# Altium PCB 剥皮器20200614.PCBDOC (part 2 of 3)
Units mm, origin at the board's own origin, x right, y up, seen from the top; angles counter-clockwise.
Board outline 140 x 88 mm, 4 copper layers (Top Layer, MidLayer1, MidLayer2, Bottom Layer); 134 components, 105 nets, 507 pads, 469 vias.
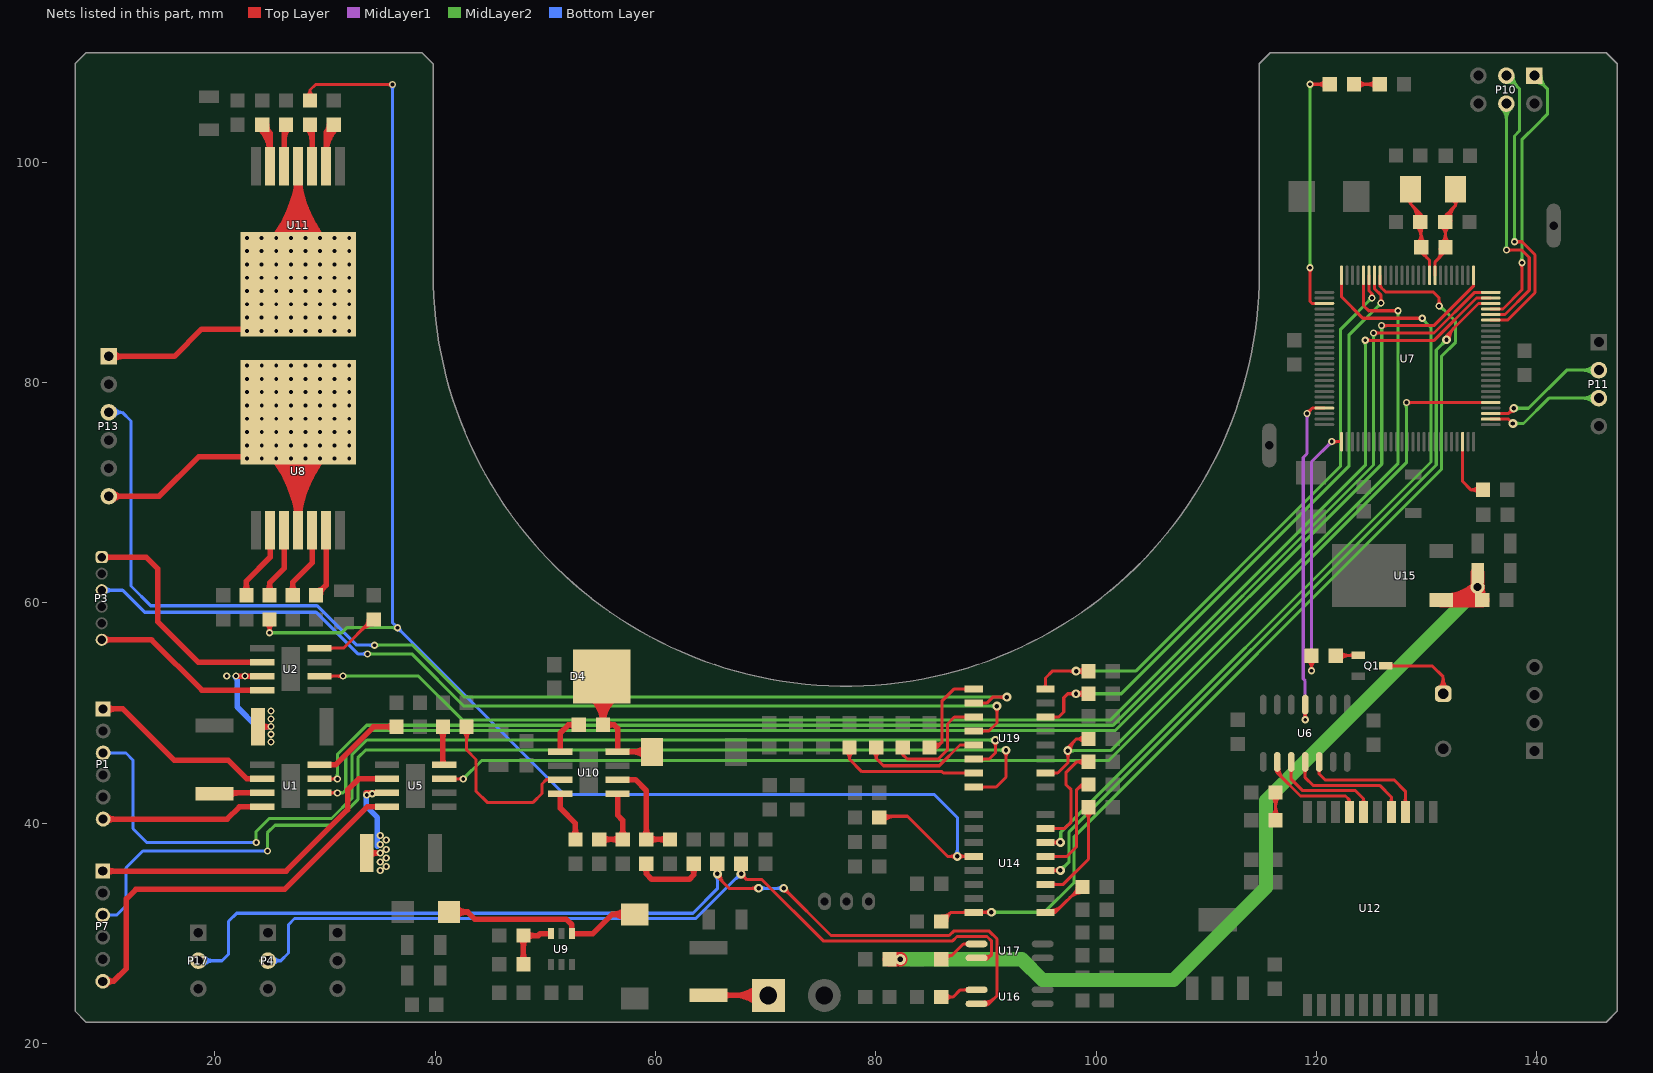
[diagram p4: the nets of this part, all layers, seen from the top]

## Via types
v1: diameter 0.65, hole 0.35, Top Layer to Bottom Layer, 296 vias
v2: diameter 0.8, hole 0.4, Top Layer to Bottom Layer, 161 vias
v3: diameter 1.27, hole 0.711, Top Layer to Bottom Layer, 6 vias
v4: diameter 1, hole 0.5, Top Layer to Bottom Layer, 6 vias

## Nets (pads, with @x,y where several pads share a name; then routed paths per layer and width w, separated by ;. In a path a pad name is that pad's centre, name@x,y a point inside that pad or via, vN(x,y) a via of type N, cw(c..) or ccw(c..) an arc to the next point about the centre after c; other vN are vias at no path point) (continued)
INH: R29.2 R31.1 R43.2 U14.12 | length 157.1
  Top Layer w0.28: R31.1@24.612,58.126 cw(c23.779,57.278) v1(24.968,57.278) ; v1@24.837,57.409 ccw(c24.522,57.724) 24.968,57.724 ccw(c25.415,57.724) v1@25.099,57.409 ; R31.1@24.968,58.488 v1(24.968,57.278) ; R31.1@25.324,58.126 ccw(c26.157,57.278) v1(24.968,57.278) ; R29.2@28.354,106.029 ccw(c28.011,106.549) 28.634,106.549 ; R29.2@28.634,105.605 28.634,106.549 ; R29.2@28.913,106.029 cw(c29.256,106.549) 28.634,106.549 ; v1@35.995,106.91 ccw(c35.679,106.594) 35.679,107.041 ccw(c35.679,107.488) v1@35.995,107.172 ; v1(36.126,107.041) 29.126,107.041 28.634,106.549 ; R43.2@80.313,40.625 82.869,40.625 86.512,36.982 U14.12@88.893,36.982 ; R43.2@80.475,40.351 cw(c81.137,39.688) 81.137,40.625 ; R43.2@80.672,40.153 cw(c81.813,39.012) 81.813,40.625 ; R43.2@80.672,40.871 ccw(c81.266,41.464) 81.266,40.625 ; 86.751,36.982 cw(c86.751,36.333) v2@87.21,36.792 ; 86.781,36.982 ccw(c86.781,37.589) v2@87.21,37.16 ; v2@87.578,36.792 cw(c88.037,36.333) 88.037,36.982 ; v2@87.578,37.16 ccw(c88.007,37.589) 88.007,36.982 ; U14.12@88.262,36.851 ccw(c87.947,36.536) 87.947,36.982 ccw(c87.947,37.429) U14.12@88.262,37.113
  MidLayer2 w0.28: v1(24.968,57.278) 31.513,57.278 31.975,57.74 v1(36.574,57.74) ; v1@25.099,57.147 cw(c25.415,56.831) 25.415,57.278 cw(c25.415,57.724) v1@25.099,57.409 ; v1@36.443,57.609 ccw(c36.127,57.293) 36.127,57.74 ccw(c36.127,58.187) v1@36.443,57.871
  Bottom Layer w0.28: v1@35.995,106.91 cw(c35.679,106.594) 36.126,106.594 cw(c36.573,106.594) v1@36.257,106.91 ; v1(36.126,107.041) 36.126,58.188 51.711,42.603 85.301,42.603 87.394,40.51 v2(87.394,36.976) ; v1@36.389,57.74 ccw(c35.942,57.74) 36.258,58.056 ccw(c36.574,58.372) v1@36.574,57.925 ; v1@36.574,57.555 cw(c36.574,57.108) 36.89,57.424 cw(c37.206,57.74) v1@36.759,57.74 ; v2@87.21,37.16 ccw(c86.766,37.604) 87.394,37.604 ccw(c88.022,37.604) v2@87.578,37.16
NetC6_1: C6.1 R45.1 U7.33 Y1.1 | length 19.1
  Top Layer w0.28: U7.33@130.767,89.726 130.767,90.95 131.703,91.887 131.703,95.164 132.628,96.089 ; 130.966,91.15 ccw(c130.26,91.856) R45.1@131.217,92.141 ; 131.298,91.482 ccw(c130.772,92.008) R45.1@131.485,92.221 ; C6.1@131.329,94.213 cw(c130.424,93.309) 131.703,93.309 ; R45.1@131.344,92.645 ccw(c130.478,93.512) 131.703,93.512 ccw(c132.929,93.512) R45.1@132.062,92.645 ; C6.1@131.636,94.562 cw(c132.491,94.722) 131.876,95.337 ; 131.703,93.384 cw(c132.876,93.384) C6.1@132.047,94.213 ; C6.1@131.912,94.614 cw(c133.125,94.84) 132.252,95.713 ; C6.1@132.187,94.665 cw(c133.758,94.958) 132.628,96.089 ; Y1.1@132.327,96.535 cw(c132.146,96.089) 132.628,96.089 ; Y1.1@132.628,97.645 132.628,96.089 ; Y1.1@132.93,96.533 ccw(c133.106,96.089) 132.628,96.089
NetC8_1: C8.1 R45.2 U7.34 Y1.2 | length 19.8
  Top Layer w0.28: Y1.2@128.308,96.507 cw(c128.224,96.216) 128.528,96.216 ; Y1.2@128.528,97.645 128.528,96.216 ; 128.585,96.158 cw(c127.139,94.712) C8.1@129.18,94.586 ; Y1.2@128.748,96.506 ccw(c128.829,96.216) 128.528,96.216 ; 129.024,95.719 cw(c127.966,94.661) C8.1@129.46,94.569 ; C8.1@129.049,94.213 cw(c127.951,93.115) 129.503,93.115 ; R45.2@129.144,92.645 ccw(c128.278,93.512) 129.503,93.512 ccw(c130.729,93.512) R45.2@129.862,92.645 ; C8.1@129.211,95.04 ccw(c129.087,95.336) 129.408,95.336 ; C8.1@129.247,94.411 cw(c128.627,93.791) 129.503,93.791 ; C8.1@129.408,94.572 129.408,95.336 ; 129.463,95.28 cw(c128.793,94.61) C8.1@129.739,94.551 ; 129.503,93.578 cw(c130.402,93.578) C8.1@129.767,94.213 ; C8.1@129.503,94.476 129.503,91.836 130.267,91.073 U7.34@130.267,89.726 ; C8.1@129.604,95.04 cw(c129.729,95.336) 129.408,95.336 ; R45.2@129.701,92.173 ccw(c130.144,91.918) 129.783,91.557 ; R45.2@129.944,92.033 ccw(c130.473,91.73) 130.042,91.298 ; 128.528,96.216 129.408,95.336
NetC9_1: C9.1 U7.98 | length 7.4
  Top Layer w0.28: U7.98@133.267,74.626 133.267,71.007 134.018,70.256 ; C9.1@134.734,69.926 ccw(c134.018,69.313) 134.018,70.256 ; C9.1@134.734,70.586 cw(c134.018,71.2) 134.018,70.256 ; C9.1@135.12,70.256 134.018,70.256
NetC17_1: C17.1 U10.1 | length 5.1
  Top Layer w0.5: U10.1@51.35,46.482 51.35,48.175 52.095,48.92 ; C17.1@52.74,48.645 ccw(c52.095,48.027) 52.095,48.92 ; C17.1@52.74,49.196 cw(c52.095,49.813) 52.095,48.92 ; C17.1@53.027,48.92 52.095,48.92
NetC17_2: C17.2 D4.3 L2.1 U10.8 | length 28.1
  Top Layer w0.5: D4.3@53.932,51.6 cw(c51.807,48.92) C17.2@55.227,48.92 ; D4.3@54.243,51.992 cw(c52.628,49.955) 55.227,49.955 ; C17.2@54.946,49.202 ccw(c54.267,49.881) 55.227,49.881 ccw(c56.188,49.881) 55.509,49.202 ccw(c56.188,49.881) 56.188,48.92 ccw(c56.188,47.96) C17.2@55.509,48.639 ; 55.227,49.895 cw(c57.75,49.895) D4.3@56.278,51.944 ; 55.227,50.871 cw(c57.049,50.871) D4.3@55.986,52.35 ; D4.3@55.227,52.215 C17.2@55.227,48.92 ; D4.3@56.569,51.538 ccw(c58.451,48.92) C17.2@55.227,48.92 ; 57.818,46.482 cw(c57.818,44.585) L2.1@59.16,45.926 ; 57.941,46.482 ccw(c57.941,48.206) L2.1@59.16,46.987 ; L2.1@59.309,46.482 U10.8@56.55,46.482 56.55,48.606 56.236,48.92 C17.2@55.227,48.92
NetC19_1: C19.1 C22.1 U10.6 | length 13.8
  Top Layer w0.5: U10.6@56.55,43.942 58.166,43.942 59.17,42.938 C19.1@59.17,38.521 C22.1@61,38.521 ; C19.1@58.889,38.802 ccw(c58.21,39.481) 59.17,39.481 ccw(c60.13,39.481) 59.451,38.802 ccw(c60.13,39.481) 60.13,38.521 ccw(c60.13,37.561) C19.1@59.451,38.24 ; C22.1@61.035,38.24 ccw(c60.356,37.561) 60.356,38.521 ccw(c60.356,39.481) C22.1@61.035,38.802
NetC19_2: C19.2 R20.2 | length 9.6
  Top Layer w0.5: C19.2@58.895,36.034 cw(c58.278,35.389) 59.17,35.389 ; C19.2@59.17,36.321 59.17,35.389 ; C19.2@59.445,36.034 ccw(c60.062,35.389) 59.17,35.389 ; R20.2@63.181,36.04 cw(c62.502,35.361) 63.462,35.361 cw(c64.422,35.361) R20.2@63.743,36.04 ; R20.2@63.462,36.321 63.462,35.292 63.076,34.906 59.653,34.906 59.17,35.389
NetC23_1: C23.1 U10.4 | length 6.2
  Top Layer w0.5: U10.4@51.35,42.672 51.35,41.36 52.731,39.979 C23.1@52.731,38.521 ; C23.1@52.45,38.802 ccw(c51.771,39.481) 52.731,39.481 ccw(c53.692,39.481) C23.1@53.013,38.802
NetC36_1: C36.1 C37.2 L4.2 U15.1 | length 84.1
  Top Layer w1.295: L4.2@81.233,27.641 v4(82.232,27.641) ; U15.1@131.324,60.236 C37.2@135.031,60.236 ; U15.1@131.781,60.236 ccw(c131.781,64.268) v3@134.632,61.417 ; C37.2@134.623,60.265 C36.1@134.623,62.708 ; v3@134.623,61.264 ccw(c136.059,61.264) C37.2@135.044,60.249
  MidLayer2 w1.295: v4(82.232,27.641) 93.235,27.641 95.127,25.749 107.01,25.749 115.415,34.154 115.415,42.055 134.623,61.263 v3(134.623,61.426)
NetD2_1: D2.1 R8.1 | length 5.9
  Top Layer w0.28: D2.1@123.411,107.072 R8.1@125.501,107.072 ; D2.1@123.77,106.713 cw(c124.637,105.847) 124.637,107.072 cw(c124.637,108.298) D2.1@123.77,107.431 ; R8.1@125.383,106.713 ccw(c124.517,105.847) 124.517,107.072 ccw(c124.517,108.298) R8.1@125.383,107.431
NetD3_1: D3.1 L1.2 U9.1 | length 24.2
  Top Layer w0.5: D3.1@41.254,31.934 42.938,31.934 ; D3.1@41.811,31.432 cw(c42.938,30.417) 42.938,31.934 ; D3.1@41.811,32.435 ccw(c42.938,33.45) 42.938,31.934 ; L1.2@57.33,31.181 ccw(c56.055,29.91) 56.055,31.71 ; L1.2@57.33,32.24 cw(c56.055,33.511) 56.055,31.71 ; L1.2@58.111,31.71 56.054,31.71 ; 42.938,31.934 43.609,31.263 51.918,31.263 52.406,30.775 U9.1@52.406,29.972 54.316,29.972 56.054,31.71
NetD6_2: D6.2 R23.1 | length 6.3
  Top Layer w0.28: D6.2@115.93,40.618 ccw(c115.063,41.485) 116.289,41.485 ccw(c117.515,41.485) D6.2@116.648,40.618 ; R23.1@115.93,42.415 cw(c115.063,41.548) 116.289,41.548 cw(c117.515,41.548) R23.1@116.648,42.415 ; D6.2@116.289,40.322 R23.1@116.289,42.774
NetF1_1: F1.1 P12.1 | length 14.3
  Top Layer w0.5: F1.1@64.816,24.379 P12.1@70.22,24.379 ; F1.1@66.174,24.131 cw(c66.771,23.534) 66.771,24.379 cw(c66.771,25.224) F1.1@66.174,24.626 ; 67.172,24.379 cw(c67.172,21.29) P12.1@69.357,23.474 ; 67.273,24.379 ccw(c67.273,27.326) P12.1@69.357,25.242 ; 68.38,24.379 cw(c68.38,22.497) P12.1@69.71,23.828 ; 68.48,24.379 ccw(c68.48,26.118) P12.1@69.71,24.888
NetLS1_1: LS1.1 Q1.3 | length 11.5
  Top Layer w0.28: Q1.3@126.294,54.28 130.492,54.28 131.496,53.276 LS1.1@131.496,51.741 ; Q1.3@126.718,54.131 cw(c127.076,53.773) 127.076,54.28 cw(c127.076,54.787) Q1.3@126.718,54.428 ; LS1.1@131.065,52.172 ccw(c130.023,53.213) 131.496,53.213 ccw(c132.969,53.213) LS1.1@131.927,52.172 ; LS1.1@131.263,51.974 ccw(c130.699,52.537) 131.496,52.537 ccw(c132.293,52.537) LS1.1@131.729,51.974
NetP1_1: P1.1 U1.6 | length 18.7
  Top Layer w0.5: P1.1@9.86,50.363 11.65,50.363 16.293,45.72 21.209,45.72 22.911,44.018 U1.6@24.299,44.018 ; P1.1@10.161,50.063 cw(c10.886,49.337) 10.886,50.363 cw(c10.886,51.389) P1.1@10.161,50.664
NetP1_6: P1.6 U1.8 | length 16.5
  Top Layer w0.5: P1.6@9.86,40.363 21.111,40.363 22.226,41.478 U1.8@24.299,41.478 ; P1.6@10.161,40.063 cw(c10.886,39.337) 10.886,40.363 cw(c10.886,41.389) P1.6@10.161,40.664
NetP3_1: P3.1 U2.6 | length 22.5
  Top Layer w0.5: P3.1@9.728,64.143 13.76,64.143 14.818,63.085 14.818,58.262 18.47,54.61 U2.6@24.299,54.61 ; P3.1@9.94,63.931 cw(c10.452,63.419) 10.452,64.143 cw(c10.452,64.867) P3.1@9.94,64.355
NetP3_6: P3.6 U2.8 | length 17.6
  Top Layer w0.5: P3.6@9.728,56.643 14.246,56.643 18.819,52.07 U2.8@24.299,52.07 ; P3.6@9.94,56.431 cw(c10.452,55.919) 10.452,56.643 cw(c10.452,57.367) P3.6@9.94,56.855
NetP4_2: P4.2 R36.2 U17.2 | length 84.5
  Top Layer w0.28: R36.2@67.484,35.891 cw(c67.173,35.4) v2@67.754,35.4 ; v2@67.582,35.573 ccw(c67.166,35.989) R36.2@67.754,35.989 ; R36.2@67.754,36.044 ccw(c68.421,36.044) v2@67.95,35.573 ; R36.2@67.754,36.321 v2@67.754,35.4 ; v2@67.766,35.129 cw(c67.766,34.502) 68.209,34.945 ; v2(67.766,35.389) 68.287,34.868 69.67,34.868 75.226,29.312 86.969,29.312 87.366,29.709 90.089,29.709 90.509,29.289 90.509,28.064 ; R36.2@68.025,35.891 ccw(c68.336,35.4) v2@67.754,35.4 ; v2@68.026,35.389 ccw(c68.654,35.389) 68.21,34.944 ; U17.2@89.143,27.762 90.207,27.762 ; U17.2@89.807,27.648 ccw(c89.921,28.003) 90.184,27.739 ; U17.2@89.892,27.915 ccw(c90.078,28.495) 90.509,28.064 ; U17.2@89.961,27.654 cw(c90.207,27.428) 90.207,27.762 ; U17.2@89.961,27.87 ccw(c90.207,28.096) 90.207,27.762 ; 90.207,27.762 90.509,28.064
  Bottom Layer w0.28: P4.2@24.816,27.508 25.987,27.508 ; P4.2@25.315,27.158 cw(c25.987,26.688) 25.987,27.508 ; P4.2@25.315,27.858 ccw(c25.987,28.328) 25.987,27.508 ; 67.219,34.902 cw(c67.766,34.356) v2@67.766,35.129 ; 67.365,35.048 ccw(c67.024,35.389) v2@67.506,35.389 ; v2@67.752,35.596 67.752,35.435 63.653,31.336 27.232,31.336 26.683,30.787 26.683,28.204 25.987,27.508
NetP7_1: P7.1 U5.6 | length 31.1
  Top Layer w0.5: P7.1@9.822,35.644 26.462,35.644 32.052,41.234 32.052,43.012 33.058,44.018 U5.6@34.84,44.018 ; P7.1@10.122,35.344 cw(c10.848,34.618) 10.848,35.644 cw(c10.848,36.67) P7.1@10.122,35.945
NetP7_6: P7.6 U5.8 | length 37.6
  Top Layer w0.5: P7.6@9.822,25.644 10.816,25.644 ; P7.6@10.129,25.351 cw(c10.816,24.693) 10.816,25.644 ; P7.6@10.129,25.938 ccw(c10.816,26.596) 10.816,25.644 ; U5.8@35.613,41.478 33.814,41.478 26.329,33.993 12.823,33.993 11.962,33.132 11.962,26.79 10.816,25.644
NetP13_1: P13.1 U11.4 U11.8 | length 106.5
  Top Layer w0.5: P13.1@10.37,82.372 16.332,82.372 18.796,84.836 26.543,84.836 cw(c26.543,84.523) U11.8@26.828,84.653 ; P13.1@10.724,82.019 cw(c11.577,81.165) 11.577,82.372 cw(c11.577,83.579) P13.1@10.724,82.726 ; U11.8@22.374,84.836 cw(c22.374,84.135) U11.8@22.87,84.631 ; U11.8@22.976,84.631 cw(c23.472,84.135) U11.8@23.472,84.836 ; U11.8@23.699,84.836 cw(c23.699,84.135) U11.8@24.195,84.631 ; U11.8@24.301,84.631 cw(c24.797,84.135) U11.8@24.797,84.836 ; U11.8@24.412,92.135 ccw(c17.089,99.618) U11.4@27.559,99.619 ; U11.8@24.761,91.778 ccw(c18.253,98.429) 27.559,98.429 ccw(c36.865,98.429) U11.8@30.357,91.778 ; U11.8@25.023,84.836 cw(c25.023,84.135) U11.8@25.519,84.631 ; U11.8@25.111,91.42 ccw(c19.416,97.241) 27.559,97.241 ccw(c35.702,97.241) U11.8@30.007,91.42 ; U11.8@25.461,91.063 ccw(c20.579,96.052) 27.559,96.052 ccw(c34.539,96.052) U11.8@29.657,91.063 ; U11.8@25.625,84.631 cw(c26.121,84.135) U11.8@26.121,84.836 ; U11.8@25.811,90.706 ccw(c21.743,94.863) 27.559,94.863 ccw(c33.375,94.863) U11.8@29.307,90.706 ; U11.8@26.16,90.348 ccw(c22.906,93.674) 27.559,93.674 ccw(c32.212,93.674) U11.8@28.958,90.348 ; U11.8@26.347,84.836 cw(c26.347,84.135) U11.8@26.843,84.631 ; U11.4@27.418,98.177 cw(c27.076,97.836) 27.559,97.836 cw(c28.042,97.836) U11.4@27.7,98.177 ; U11.8@27.559,89.408 U11.4@27.559,99.619 ; U11.8@30.706,92.135 cw(c38.029,99.618) U11.4@27.559,99.619
  other v1: 22.923,84.684 24.248,84.684 25.572,84.684 26.896,84.684 28.221,84.684 29.545,84.684 30.87,84.684 32.194,84.684 22.923,85.89 24.248,85.89 25.572,85.89 26.896,85.89 28.221,85.89 29.545,85.89 30.87,85.89 32.194,85.89 22.923,87.097 24.248,87.097 25.572,87.097 26.896,87.097 28.221,87.097 29.545,87.097 30.87,87.097 32.194,87.097 22.923,88.303 24.248,88.303 25.572,88.303 26.896,88.303 28.221,88.303 29.545,88.303 30.87,88.303 32.194,88.303 22.923,89.51 24.248,89.51 25.572,89.51 26.896,89.51 28.221,89.51 29.545,89.51 30.87,89.51 32.194,89.51 22.923,90.716 24.248,90.716 25.572,90.716 26.896,90.716 28.221,90.716 29.545,90.716 30.87,90.716 32.194,90.716 22.923,91.923 24.248,91.923 25.572,91.923 26.896,91.923 28.221,91.923 29.545,91.923 30.87,91.923 32.194,91.923 22.923,93.129 24.248,93.129 25.572,93.129 26.896,93.129 28.221,93.129 29.545,93.129 30.87,93.129 32.194,93.129
NetP13_6: P13.6 U8.4 U8.8 | length 105.8
  Top Layer w0.5: P13.6@10.37,69.672 14.935,69.672 18.542,73.279 26.162,73.279 ccw(c26.162,72.567) U8.8@25.629,73.039 ; P13.6@10.724,69.319 cw(c11.577,68.465) 11.577,69.672 cw(c11.577,70.879) P13.6@10.724,70.026 ; 22.283,73.279 cw(c22.283,72.448) U8.8@22.871,73.035 ; U8.8@22.977,73.035 cw(c23.565,72.448) U8.8@23.565,73.279 ; U8.8@23.607,73.279 cw(c23.607,72.448) U8.8@24.195,73.035 ; U8.8@24.301,73.035 cw(c24.889,72.448) U8.8@24.889,73.279 ; U8.8@24.412,74.082 cw(c17.089,66.599) U8.4@27.559,66.599 cw(c38.029,66.599) U8.8@30.706,74.082 ; U8.8@24.761,74.44 cw(c18.253,67.788) 27.559,67.788 cw(c36.865,67.788) U8.8@30.357,74.44 ; U8.8@24.932,73.279 cw(c24.932,72.448) U8.8@25.52,73.035 ; U8.8@25.111,74.797 cw(c19.416,68.977) 27.559,68.977 cw(c35.702,68.977) U8.8@30.007,74.797 ; U8.8@25.461,75.155 cw(c20.579,70.166) 27.559,70.166 cw(c34.539,70.166) U8.8@29.657,75.155 ; U8.8@25.811,75.512 cw(c21.743,71.355) 27.559,71.355 cw(c33.375,71.355) U8.8@29.307,75.512 ; U8.8@26.16,75.869 cw(c22.906,72.544) 27.559,72.544 cw(c32.212,72.544) U8.8@28.958,75.869 ; U8.4@27.418,68.04 ccw(c27.076,68.382) 27.559,68.382 ccw(c28.042,68.382) U8.4@27.7,68.04 ; U8.4@27.559,66.599 U8.8@27.559,76.327
  other v1: 22.924,73.088 24.248,73.088 25.573,73.088 26.897,73.088 28.222,73.088 29.546,73.088 30.87,73.088 32.195,73.088 22.924,74.295 24.248,74.295 25.573,74.295 26.897,74.295 28.222,74.295 29.546,74.295 30.87,74.295 32.195,74.295 22.924,75.501 24.248,75.501 25.573,75.501 26.897,75.501 28.222,75.501 29.546,75.501 30.87,75.501 32.195,75.501 22.924,76.708 24.248,76.708 25.573,76.708 26.897,76.708 28.222,76.708 29.546,76.708 30.87,76.708 32.195,76.708 22.924,77.915 24.248,77.915 25.573,77.915 26.897,77.915 28.222,77.915 29.546,77.915 30.87,77.915 32.195,77.915 22.924,79.121 24.248,79.121 25.573,79.121 26.897,79.121 28.222,79.121 29.546,79.121 30.87,79.121 32.195,79.121 22.924,80.328 24.248,80.328 25.573,80.328 26.897,80.328 28.222,80.328 29.546,80.328 30.87,80.328 32.195,80.328 22.924,81.534 24.248,81.534 25.573,81.534 26.897,81.534 28.222,81.534 29.546,81.534 30.87,81.534 32.195,81.534
NetP17_2: P17.2 R33.2 U16.2 | length 104.6
  Top Layer w0.28: R33.2@65.258,35.954 cw(c64.501,35.162) v2@65.596,35.162 ; v2@65.433,35.573 ccw(c65.04,35.966) R33.2@65.596,35.966 ; R33.2@65.596,36.067 ccw(c66.295,36.067) v2@65.801,35.573 ; R33.2@65.596,36.527 v2@65.596,35.162 ; v2@65.597,35.389 ccw(c66.147,35.389) 65.758,35 ; v2@65.877,35.389 ccw(c67.103,35.389) 66.236,34.522 ; R33.2@65.946,35.942 ccw(c66.639,35.162) v2@65.596,35.162 ; v2@69.171,33.9 ccw(c68.727,33.456) 68.727,34.084 ccw(c68.727,34.712) v2@69.171,34.268 ; v2(69.355,34.084) 66.674,34.084 v2@65.596,35.162 ; v2@71.644,33.824 cw(c71.644,33.196) 72.088,33.64 cw(c72.532,34.084) v2@71.904,34.084 ; v2(71.644,34.084) 75.935,29.793 86.659,29.793 87.059,30.193 90.293,30.193 90.992,29.494 90.992,24.319 90.27,23.597 U16.2@89.143,23.597 ; U16.2@89.843,23.477 ccw(c89.843,24.216) 90.366,23.693 ; U16.2@89.843,23.757 ccw(c89.843,25.172) 90.844,24.171 ; U16.2@89.956,23.483 cw(c90.229,23.21) 90.229,23.597 cw(c90.229,23.983) U16.2@89.956,23.71
  Bottom Layer w0.28: P17.2@18.504,27.508 20.653,27.508 21.244,28.099 21.244,31.081 21.979,31.816 63.398,31.816 65.617,34.035 v2(65.617,35.389) ; P17.2@18.737,27.275 cw(c19.301,26.712) 19.301,27.508 cw(c19.301,28.305) P17.2@18.737,27.742 ; P17.2@18.935,27.077 cw(c19.977,26.036) 19.977,27.508 cw(c19.977,28.981) P17.2@18.935,27.94 ; v2@65.433,35.205 cw(c64.989,34.761) 65.617,34.761 cw(c66.245,34.761) v2@65.801,35.205 ; v2(69.355,34.084) v2(71.644,34.084) ; v2@69.539,33.9 cw(c69.983,33.456) 69.983,34.084 cw(c69.983,34.712) v2@69.539,34.268 ; v2@71.46,33.9 ccw(c71.016,33.456) 71.016,34.084 ccw(c71.016,34.712) v2@71.46,34.268
NetQ1_1: Q1.1 R12.1 | length 4.7
  Top Layer w0.28: R12.1@121.786,55.23 Q1.1@123.794,55.23 ; R12.1@122.109,54.835 cw(c123.062,53.883) 123.062,55.23 ; R12.1@122.109,55.553 ccw(c122.89,56.334) 122.89,55.23 ; Q1.1@123.371,55.081 ccw(c123.012,54.723) 123.012,55.23 ccw(c123.012,55.737) Q1.1@123.371,55.378
NetR1_2: R1.2 U17.1 | length 5.2
  Top Layer w0.28: R1.2@86.154,27.613 cw(c86.579,27.559) 86.579,27.987 ; R1.2@86.288,27.987 86.897,27.987 ; R1.2@86.432,27.577 cw(c86.897,27.518) 86.897,27.987 ; U17.1@88.33,28.919 ccw(c88.057,28.646) 88.057,29.032 ccw(c88.057,29.418) U17.1@88.33,29.145 ; U17.1@89.143,29.032 87.942,29.032 86.897,27.987
NetR3_2: R3.2 U1.7 | length 5.1
  Top Layer w0.5: R3.2@20.625,42.748 U1.7@24.299,42.748 ; R3.2@21.315,42.406 cw(c22.142,41.579) 22.142,42.748 ; R3.2@21.315,42.936 ccw(c21.768,43.389) 21.768,42.748
NetR4_2: R4.2 U2.7 | length 11.9
  Top Layer w0.5: v1@22.031,53.34 U2.7@24.299,53.34 ; R4.2@23.926,48.743 v1@25.085,48.743 ; R4.2@24.191,48.477 cw(c24.831,47.837) 24.831,48.743 cw(c24.831,49.648) R4.2@24.191,49.008
  Bottom Layer w0.5: v1@21.854,53.287 cw(c21.428,52.861) 22.031,52.861 ; v1@22.031,53.34 22.031,50.555 23.843,48.743 v1@25.085,48.743
  other v1: 25.085,47.371 25.085,48.069 25.085,48.768 25.085,49.466 25.085,50.165 21.082,53.34 21.907,53.34 22.733,53.34
NetR11_2: R11.2 U5.7 | length 9.8
  Top Layer w0.5: R11.2@33.721,37.287 v1@35.007,37.287 ; v1@33.758,42.748 U5.7@35.613,42.748 ; R11.2@34.046,37.022 cw(c34.686,36.382) 34.686,37.287 cw(c34.687,38.193) R11.2@34.046,37.552
  Bottom Layer w0.5: v1@33.758,42.748 33.758,41.495 34.753,40.5 v1@34.753,37.922
  other v1: 35.007,35.687 35.56,36.068 35.007,36.481 35.56,36.83 35.007,37.274 35.56,37.592 35.007,38.068 35.56,38.481 35.007,38.862 33.782,42.545 34.29,42.672
NetR13_2: R13.2 U11.5 | length 5.6
  Top Layer w0.5: U11.5@26.148,101.06 ccw(c25.806,101.402) 26.289,101.402 ccw(c26.772,101.402) U11.5@26.43,101.06 ; U11.5@26.289,99.619 R13.2@26.289,103.236 ; 26.289,102.035 cw(c27.829,102.035) R13.2@26.74,103.124
NetR14_1: R14.1 U11.2 | length 10.6
  Top Layer w0.5: U11.2@29.958,101.06 ccw(c29.616,101.402) 30.099,101.402 ccw(c30.582,101.402) U11.2@30.24,101.06 ; U11.2@30.099,99.619 30.099,102.72 R14.1@30.785,103.405 ; U11.2@30.099,100.79 cw(c33.401,100.79) R14.1@31.066,103.124 ; 30.099,101.997 cw(c32.193,101.997) R14.1@30.712,103.478 ; R14.1@30.387,103.405 cw(c29.427,103.405) 30.106,102.726 cw(c30.785,102.048) R14.1@30.785,103.008
NetR15_2: R15.2 R16.1 U9.3 | length 9.8
  Top Layer w0.5: R15.2@47.728,27.47 ccw(c47.049,28.149) 48.01,28.149 ccw(c48.97,28.149) R15.2@48.291,27.47 ; R16.1@47.728,29.51 cw(c47.049,28.831) 48.01,28.831 cw(c48.97,28.831) 48.291,29.51 cw(c48.97,28.831) 48.97,29.791 cw(c48.97,30.751) R16.1@48.291,30.072 ; R15.2@48.01,27.121 R16.1@48.01,29.791 49.347,29.791 49.518,29.962 U9.3@50.506,29.962
NetR17_1: R17.1 R19.2 U10.5 | length 11.2
  Top Layer w0.5: R19.2@54.902,38.521 R17.1@57.19,38.521 ; R19.2@55.183,38.24 cw(c55.862,37.561) 55.862,38.521 cw(c55.862,39.481) R19.2@55.183,38.802 ; U10.5@56.55,42.672 56.55,40.732 57.024,40.258 R17.1@57.024,38.521 ; R17.1@56.742,38.24 ccw(c56.064,37.561) 56.064,38.521 ccw(c56.064,39.481) 56.742,38.802 ccw(c56.064,39.481) 57.024,39.481 ccw(c57.984,39.481) R17.1@57.305,38.802
NetR21_2: R21.2 U11.6 | length 10.3
  Top Layer w0.5: R21.2@24.027,103.124 cw(c21.631,100.728) U11.6@25.019,100.728 ; R21.2@24.308,103.008 cw(c24.308,102.236) R21.2@24.853,102.782 ; R21.2@24.38,103.478 cw(c22.838,101.935) 25.019,101.935 ; R21.2@24.511,103.124 25.019,102.616 U11.6@25.019,99.619 ; R21.2@24.705,103.381 ccw(c25.648,103.324) 24.98,102.655 ; U11.6@24.878,101.06 ccw(c24.536,101.402) 25.019,101.402 ccw(c25.502,101.402) U11.6@25.16,101.06
NetR24_2: R24.2 U8.5 | length 8.9
  Top Layer w0.5: R24.2@26.795,60.97 ccw(c26.116,61.649) 27.076,61.649 ccw(c28.037,61.649) R24.2@27.358,60.97 ; R24.2@27.076,60.688 27.076,61.874 28.829,63.627 U8.5@28.829,66.599 ; U8.5@28.688,65.157 cw(c28.346,64.816) 28.829,64.816 cw(c29.312,64.816) U8.5@28.97,65.157
NetR25_2: R25.2 U2.4 | length 8.9
  Top Layer w0.28: U2.4@29.499,55.88 31.669,55.88 R25.2@34.117,58.328 ; U2.4@30.412,55.767 cw(c30.685,55.494) 30.685,55.88 cw(c30.685,56.266) U2.4@30.412,55.993 ; 33.312,57.523 cw(c34.417,56.418) R25.2@34.417,57.981 ; 33.649,57.86 ccw(c33.021,58.488) R25.2@33.909,58.488 ; R25.2@33.79,58.001 cw(c34.417,57.374) R25.2@34.417,58.261
NetR26_2: R26.2 U8.6 | length 8.6
  Top Layer w0.5: R26.2@29.185,60.688 30.099,61.603 U8.6@30.099,66.599 ; R26.2@29.185,61.086 ccw(c29.185,62.046) 29.864,61.367 ccw(c30.542,60.688) R26.2@29.582,60.688 ; U8.6@29.958,65.157 cw(c29.616,64.816) 30.099,64.816 cw(c30.582,64.816) U8.6@30.24,65.157
NetR27_2: R27.2 U1.4 | length 9.9
  Top Layer w0.5: U1.4@29.499,45.288 30.937,45.288 34.388,48.739 R27.2@36.486,48.739 ; R27.2@36.205,48.458 ccw(c35.526,47.779) 35.526,48.739 ccw(c35.526,49.699) R27.2@36.205,49.02
NetR28_2: R28.2 U5.4 | length 5.2
  Top Layer w0.5: R28.2@40.421,48.458 cw(c39.742,47.779) 40.703,47.779 cw(c41.663,47.779) R28.2@40.984,48.458 ; U5.4@40.703,45.399 R28.2@40.703,48.739 ; 40.703,45.676 ccw(c41.202,45.676) U5.4@40.849,45.324
NetR29_1: R29.1 U11.3 | length 5.6
  Top Layer w0.5: R29.1@28.353,103.124 cw(c27.202,101.974) 28.829,101.974 ; U11.3@28.688,101.06 ccw(c28.346,101.402) 28.829,101.402 ccw(c29.312,101.402) U11.3@28.97,101.06 ; U11.3@28.829,99.619 R29.1@28.829,103.21
NetR30_2: R30.2 U8.2 | length 9.1
  Top Layer w0.5: R30.2@22.579,60.97 ccw(c21.9,61.649) 22.86,61.649 ccw(c23.82,61.649) R30.2@23.141,60.97 ; R30.2@22.86,60.688 22.86,61.976 25.019,64.135 U8.2@25.019,66.599 ; U8.2@24.878,65.157 cw(c24.536,64.816) 25.019,64.816 cw(c25.502,64.816) U8.2@25.16,65.157
NetR31_2: R31.2 U8.3 | length 8.7
  Top Layer w0.5: R31.2@24.687,60.97 ccw(c24.008,61.649) 24.968,61.649 ccw(c25.928,61.649) R31.2@25.249,60.97 ; R31.2@24.968,60.688 24.968,61.798 26.289,63.119 U8.3@26.289,66.599 ; U8.3@26.148,65.157 cw(c25.806,64.816) 26.289,64.816 cw(c26.772,64.816) U8.3@26.43,65.157
NetR32_2: R32.2 U16.1 | length 5.7
  Top Layer w0.28: R32.2@85.928,24.216 87.018,24.216 ; R32.2@86.317,23.889 cw(c87.017,23.301) 87.017,24.216 ; R32.2@86.317,24.542 ccw(c87.017,25.13) 87.017,24.216 ; U16.1@88.33,24.753 ccw(c88.057,24.48) 88.057,24.867 ccw(c88.057,25.253) U16.1@88.33,24.98 ; U16.1@89.143,24.867 87.669,24.867 87.018,24.216
NetR40_1: R40.1 U14.1 | length 9.1
  Top Layer w0.28: U14.1@95.393,31.902 96.286,31.902 ; U14.1@95.893,31.807 ccw(c95.893,32.527) 96.402,32.018 ; U14.1@95.893,32.087 ccw(c95.893,33.483) 96.88,32.496 ; U14.1@96.036,31.784 cw(c96.286,31.577) 96.286,31.902 ; U14.1@96.036,32.02 ccw(c96.286,32.227) 96.286,31.902 ; 97.594,33.21 cw(c98.764,32.039) R40.1@98.764,33.694 ; 98.023,33.639 ccw(c97.459,34.202) R40.1@98.256,34.202 ; 98.072,33.688 cw(c98.764,32.995) R40.1@98.764,33.974 ; R40.1@98.586,34.202 96.286,31.902
NetR41_1: R41.1 U14.3 | length 12.2
  Top Layer w0.28: U14.3@95.393,34.442 97.02,34.442 99.306,36.728 R41.1@99.306,41.453 ; U14.3@96.024,34.311 cw(c96.34,33.996) 96.34,34.442 cw(c96.34,34.889) U14.3@96.024,34.573 ; R41.1@98.947,41.094 cw(c98.08,40.227) 99.306,40.227 cw(c100.532,40.227) R41.1@99.665,41.094
NetR44_1: R44.1 U14.5 | length 12.3
  Top Layer w0.28: U14.5@95.393,36.982 97.348,36.982 98.209,37.843 98.209,43.016 98.699,43.506 R44.1@99.306,43.506 ; U14.5@96.024,36.851 cw(c96.34,36.536) 96.34,36.982 cw(c96.34,37.429) U14.5@96.024,37.113 ; 98.233,43.04 cw(c98.942,42.332) R44.1@99.239,43.289 ; 98.561,43.368 cw(c99.097,42.833) R44.1@99.322,43.556
NetR46_1: R46.1 U19.1 | length 12.2
  Top Layer w0.28: R46.1@84.832,46.812 ccw(c85.144,47.277) 85.54,46.881 ; R46.1@84.861,46.855 85.514,46.855 ; R46.1@84.988,47.044 ccw(c85.337,47.566) 85.781,47.122 ; R46.1@85.144,47.277 ccw(c85.531,47.854) 86.022,47.363 ; R46.1@85.353,46.73 cw(c85.514,46.689) 85.514,46.855 ; R46.1@85.353,46.98 ccw(c85.514,47.021) 85.514,46.855 ; U19.1@88.262,52.035 ccw(c87.947,51.72) 87.947,52.166 ccw(c87.947,52.613) U19.1@88.262,52.297 ; U19.1@88.893,52.166 87.08,52.166 86.022,51.108 86.022,47.363 ; 85.514,46.855 86.022,47.363
NetR47_1: R47.1 U19.3 | length 10.9
  Top Layer w0.28: R47.1@82.444,46.855 82.444,46.216 82.83,45.83 85.686,45.83 86.505,46.649 86.505,49.001 87.13,49.626 U19.3@88.893,49.626 ; U19.3@88.262,49.495 ccw(c87.947,49.18) 87.947,49.626 ccw(c87.947,50.073) U19.3@88.262,49.757
NetR48_1: R48.1 U19.5 | length 12.9
  Top Layer w0.28: R48.1@79.732,46.442 cw(c79.321,45.868) 80.027,45.868 ; R48.1@80.027,46.855 80.027,45.868 ; R48.1@80.322,46.442 ccw(c80.733,45.868) 80.027,45.868 ; U19.5@88.262,46.955 ccw(c87.947,46.64) 87.947,47.086 ccw(c87.947,47.533) U19.5@88.262,47.217 ; U19.5@88.893,47.086 87.642,47.086 85.763,45.207 80.688,45.207 80.027,45.868
NetR52_1: R52.1 U19.7 | length 15.1
  Top Layer w0.28: R52.1@77.293,46.458 cw(c76.768,45.8) 77.61,45.8 cw(c78.452,45.8) R52.1@77.926,46.458 ; R52.1@77.61,46.855 77.61,45.8 78.735,44.675 85.994,44.675 86.123,44.546 U19.7@88.893,44.546 ; U19.7@88.262,44.415 ccw(c87.947,44.1) 87.947,44.546 ccw(c87.947,44.993) U19.7@88.262,44.677
NetR54_1: R54.1 U14.7 | length 12.1
  Top Layer w0.28: U14.7@95.393,39.522 97.158,39.522 97.729,40.093 97.729,43.02 97.243,43.506 97.243,44.57 98.233,45.56 ; U14.7@96.024,39.391 cw(c96.34,39.076) 96.34,39.522 cw(c96.34,39.969) U14.7@96.024,39.653 ; R54.1@98.914,45.237 ccw(c98.233,44.678) 98.233,45.56 ; R54.1@98.914,45.882 cw(c98.233,46.441) 98.233,45.56 ; R54.1@99.424,45.56 98.233,45.56
NetR56_1: R56.1 U10.3 | length 18.1
  Top Layer w0.28: R56.1@42.491,48.38 cw(c41.624,47.513) 42.85,47.513 cw(c44.075,47.513) R56.1@43.209,48.38 ; R56.1@42.85,48.739 42.85,46.631 43.707,45.774 43.707,42.897 44.715,41.889 48.887,41.889 49.692,42.694 49.692,43.555 50.079,43.942 U10.3@51.35,43.942 ; U10.3@50.436,43.829 ccw(c50.163,43.556) 50.163,43.942 ccw(c50.163,44.328) U10.3@50.436,44.055
NetU6_2: U6.2 U12.7 | length 13.8
  Top Layer w0.28: U6.2@116.314,44.958 ccw(c116.92,44.958) 116.491,44.53 ; U6.2@116.434,45.558 116.434,44.587 ; U6.2@116.594,44.958 ccw(c117.876,44.958) 116.969,44.052 ; 122.769,42.333 cw(c122.17,41.735) U12.7@123.007,41.605 ; U12.7@122.835,41.819 ccw(c122.622,42.115) 122.987,42.115 ; U12.7@122.987,41.008 122.987,42.115 ; U12.7@123.139,41.819 cw(c123.351,42.115) 122.987,42.115 ; 116.434,44.587 ccw(c116.083,44.587) 116.324,44.842 cw(c116.083,44.587) 116.434,44.587 ; 116.434,44.587 cw(c116.784,44.587) 116.544,44.842 ccw(c116.784,44.587) 116.434,44.587 ; 116.434,44.587 118.551,42.47 122.632,42.47 122.987,42.115
NetU6_3: U6.3 U12.6 | length 11.7
  Top Layer w0.28: U6.3@117.591,44.845 cw(c117.318,44.572) 117.704,44.572 cw(c118.09,44.572) U6.3@117.817,44.845 ; U6.3@117.704,45.558 117.704,43.996 118.75,42.95 123.545,42.95 124.257,42.238 U12.6@124.257,41.008 ; U12.6@124.073,41.792 ccw(c123.629,42.236) 124.257,42.236 ccw(c124.884,42.236) U12.6@124.441,41.792
NetU6_4: U6.4 U12.4 | length 12.9
  Top Layer w0.28: U6.4@118.861,44.845 cw(c118.588,44.572) 118.974,44.572 cw(c119.36,44.572) U6.4@119.087,44.845 ; U6.4@118.974,45.558 118.974,44.133 119.677,43.43 125.732,43.43 126.797,42.365 U12.4@126.797,41.008 ; U12.4@126.613,41.792 ccw(c126.169,42.236) 126.797,42.236 ccw(c127.424,42.236) U12.4@126.981,41.792
NetU6_5: U6.5 U12.3 | length 13.1
  Top Layer w0.28: U6.5@120.131,44.845 cw(c119.858,44.572) 120.244,44.572 cw(c120.63,44.572) U6.5@120.357,44.845 ; U6.5@120.244,45.558 120.244,44.459 120.793,43.91 127.065,43.91 128.067,42.908 U12.3@128.067,41.008 ; U12.3@127.883,41.792 ccw(c127.439,42.236) 128.067,42.236 ccw(c128.694,42.236) U12.3@128.251,41.792
P1_A: P1.3 U19.6 | length 101
  Top Layer w0.28: U19.6@88.893,45.816 90.299,45.816 90.852,46.369 v2(90.852,47.531) ; U19.6@89.524,45.685 cw(c89.84,45.37) 89.84,45.816 cw(c89.84,46.263) U19.6@89.524,45.947 ; v2@90.668,47.347 cw(c90.224,46.903) 90.852,46.903 cw(c91.48,46.903) v2@91.036,47.347
  MidLayer2 w0.28: v1(23.749,38.227) 23.749,39.243 24.925,40.419 30.589,40.419 32.465,42.295 32.465,46.225 33.792,47.552 v2@91.019,47.552 ; 90.174,47.552 cw(c90.174,46.853) v2@90.668,47.347 ; 90.275,47.552 ccw(c90.275,48.108) v2@90.668,47.715
  Bottom Layer w0.28: P1.3@9.86,46.363 11.93,46.363 12.573,45.72 12.573,39.497 13.843,38.227 v1(23.749,38.227)
P7_A: P7.3 U19.8 | length 102
  Top Layer w0.28: U19.8@88.893,43.276 90.923,43.276 91.818,44.171 v2(91.818,46.614) ; U19.8@89.524,43.145 cw(c89.84,42.83) 89.84,43.276 cw(c89.84,43.723) U19.8@89.524,43.407 ; v2@91.634,46.43 cw(c91.19,45.986) 91.818,45.986 cw(c92.446,45.986) v2@92.002,46.43
  MidLayer2 w0.28: v1(24.765,37.465) 24.765,39.116 25.459,39.81 30.659,39.81 32.976,42.127 32.976,45.93 33.681,46.635 v2@91.972,46.635 ; 91.14,46.635 cw(c91.14,45.936) v2@91.634,46.43 ; 91.241,46.635 ccw(c91.241,47.191) v2@91.634,46.798
  Bottom Layer w0.28: P7.3@9.822,31.644 11.07,31.644 11.938,32.512 11.938,35.941 13.462,37.465 v1(24.765,37.465)
P13_A: P13.3 U19.2 | length 110
  Top Layer w0.28: U19.2@88.893,50.896 90.059,50.896 90.6,51.437 v2(91.895,51.437) ; U19.2@89.524,50.765 cw(c89.84,50.45) 89.84,50.896 cw(c89.84,51.343) U19.2@89.524,51.027 ; v2@91.711,51.253 ccw(c91.267,50.809) 91.267,51.437 ccw(c91.267,52.065) v2@91.711,51.621
  MidLayer2 w0.28: v1(34.485,56.151) 37.943,56.151 42.657,51.437 v2(91.895,51.437) ; v1@34.615,56.021 cw(c34.931,55.705) 34.931,56.151 cw(c34.931,56.598) v1@34.615,56.282 ; v2@91.711,51.253 ccw(c91.267,50.809) 91.267,51.437 ccw(c91.267,52.065) v2@91.711,51.621
  Bottom Layer w0.28: P13.3@10.37,77.292 11.587,77.292 ; P13.3@10.859,76.927 cw(c11.587,76.384) 11.587,77.292 ; P13.3@10.859,77.657 ccw(c11.587,78.2) 11.587,77.292 ; v1@34.354,56.021 ccw(c34.038,55.705) 34.038,56.151 ccw(c34.038,56.598) v1@34.354,56.282 ; v1(34.485,56.151) 32.868,56.151 29.287,59.732 14.182,59.732 12.382,61.532 12.382,76.497 11.587,77.292
PA2: R12.2 U7.76 | length 28.5
  Top Layer w0.28: R12.2@119.191,54.835 cw(c118.324,53.969) 119.55,53.969 cw(c120.776,53.969) R12.2@119.909,54.835 ; v1@119.419,53.957 ccw(c119.103,54.273) 119.55,54.273 ccw(c119.997,54.273) v1@119.681,53.957 ; v1(119.55,53.826) R12.2@119.55,55.194 ; v1(121.386,74.628) U7.76@122.267,74.626 ; v1@121.517,74.497 cw(c121.829,74.185) 121.829,74.626 ; v1@121.517,74.759 ccw(c121.837,75.079) 121.837,74.626
  MidLayer1 w0.28: v1@119.419,53.957 ccw(c119.103,54.273) 119.55,54.273 ccw(c119.997,54.273) v1@119.681,53.957 ; v1(119.55,53.826) 119.55,72.792 v1(121.386,74.628) ; v1@121.201,74.628 cw(c120.754,74.628) 121.07,74.312 cw(c121.386,73.996) v1@121.386,74.443
PA3_A: P3.3 U19.4 | length 95.2
  Top Layer w0.28: U19.4@88.893,48.356 90.263,48.356 90.992,49.085 v2(90.992,50.622) ; U19.4@89.524,48.225 cw(c89.84,47.91) 89.84,48.356 cw(c89.84,48.803) U19.4@89.524,48.487 ; v2@90.808,50.438 cw(c90.364,49.994) 90.992,49.994 cw(c91.62,49.994) v2@91.176,50.438
  MidLayer2 w0.28: v1(33.841,55.36) 37.88,55.36 42.618,50.622 v2(90.992,50.622) ; v1@33.971,55.23 cw(c34.287,54.914) 34.287,55.36 cw(c34.287,55.807) v1@33.971,55.491 ; v2@90.808,50.438 ccw(c90.364,49.994) 90.364,50.622 ccw(c90.364,51.25) v2@90.808,50.806
  Bottom Layer w0.28: P3.3@9.728,61.143 11.628,61.143 13.627,59.144 29.196,59.144 32.98,55.36 v1(33.841,55.36) ; P3.3@10.018,60.853 cw(c10.718,60.153) 10.718,61.143 cw(c10.718,62.133) P3.3@10.018,61.433 ; v1@33.71,55.23 ccw(c33.394,54.914) 33.394,55.36 ccw(c33.394,55.807) v1@33.71,55.491
PA6: U6.11 U7.72 | length 34.6
  Top Layer w0.28: v1@118.843,49.521 ccw(c118.527,49.837) 118.974,49.837 ccw(c119.42,49.837) v1@119.105,49.521 ; U6.11@118.861,50.045 cw(c118.588,49.772) 118.974,49.772 cw(c119.36,49.772) U6.11@119.087,50.045 ; v1(118.974,49.39) U6.11@118.974,50.758 ; v1(119.146,77.199) 119.624,77.676 U7.72@120.717,77.676 ; v1@119.146,77.384 ccw(c119.146,77.83) 119.462,77.514 ccw(c119.778,77.199) v1@119.331,77.199
  MidLayer1 w0.28: v1@118.843,49.521 ccw(c118.527,49.837) 118.974,49.837 ccw(c119.42,49.837) v1@119.105,49.521 ; v1(118.974,49.39) 118.974,52.918 118.796,53.096 118.796,73.186 119.146,73.536 v1(119.146,77.199) ; v1@119.015,77.068 cw(c118.699,76.752) 119.146,76.752 cw(c119.593,76.752) v1@119.277,77.068
PB1: P10.3 U7.20 | length 31.6
  Top Layer w0.28: U7.20@135.817,85.676 137.362,85.676 139.838,88.152 139.838,91.589 138.655,92.772 v1(137.969,92.772) ; v1@138.1,92.641 cw(c138.416,92.325) 138.416,92.772 cw(c138.416,93.219) v1@138.1,92.903
  MidLayer2 w0.28: P10.3@137.236,107.245 cw(c137.236,105.773) 138.278,106.814 cw(c139.319,107.855) P10.3@137.846,107.855 ; P10.3@137.236,107.525 cw(c137.236,106.729) 137.8,107.292 cw(c138.363,107.855) P10.3@137.566,107.855 ; P10.3@137.236,107.855 138.431,106.66 138.431,102.838 137.969,102.376 v1(137.969,92.772) ; v1@137.838,92.903 ccw(c137.522,93.219) 137.969,93.219 ccw(c138.416,93.219) v1@138.1,92.903
PB2: P10.4 U7.21 | length 28
  Top Layer w0.28: U7.21@135.817,86.176 137.106,86.176 139.31,88.38 139.31,91.34 138.627,92.023 v1(137.236,92.023) ; v1@137.367,91.892 cw(c137.683,91.576) 137.683,92.023 cw(c137.683,92.47) v1@137.367,92.154
  MidLayer2 w0.28: P10.4@136.805,104.884 cw(c135.764,103.843) 137.236,103.843 cw(c138.709,103.843) P10.4@137.668,104.884 ; P10.4@137.003,105.082 cw(c136.44,104.519) 137.236,104.519 cw(c138.033,104.519) P10.4@137.47,105.082 ; v1@137.105,92.154 ccw(c136.79,92.47) 137.236,92.47 ccw(c137.683,92.47) v1@137.367,92.154 ; v1(137.236,92.023) P10.4@137.236,105.315
PB3: P10.1 U7.22 | length 29.4
  Top Layer w0.28: U7.22@135.817,86.676 136.927,86.676 138.641,88.39 v1(138.641,90.868) ; v1@138.51,90.737 cw(c138.194,90.421) 138.641,90.421 cw(c139.088,90.421) v1@138.772,90.737
  MidLayer2 w0.28: v1@138.51,90.999 ccw(c138.194,91.315) 138.641,91.315 ccw(c139.088,91.315) v1@138.772,90.999 ; v1(138.641,90.868) 138.641,102.033 140.011,103.403 140.958,104.35 140.958,106.674 P10.1@139.776,107.855 ; P10.1@139.776,107.245 cw(c139.776,105.771) 140.819,106.813 ; P10.1@139.776,107.525 cw(c139.776,106.727) P10.1@140.341,107.291 ; P10.1@140.106,107.855 ccw(c140.901,107.855) P10.1@140.339,107.293 ; P10.1@140.386,107.855 ccw(c141.857,107.855) 140.817,106.815
PB4: U7.23 U14.4 | length 75.2
  Top Layer w0.28: U14.4@95.393,35.712 v2@96.783,35.712 ; U14.4@96.024,35.581 cw(c96.34,35.266) 96.34,35.712 cw(c96.34,36.159) U14.4@96.024,35.843 ; v2@96.564,35.528 ccw(c96.121,35.085) 96.121,35.712 ccw(c96.121,36.34) v2@96.564,35.896 ; v2@131.782,83.882 cw(c132.664,83.882) 132.04,84.506 ; v2(131.802,83.882) 131.802,84.267 134.711,87.176 U7.23@135.817,87.176 ; v2@132.062,83.882 cw(c133.62,83.882) 132.518,84.984
  MidLayer2 w0.28: v2@96.748,35.972 ccw(c96.748,36.684) 97.252,36.181 ; v2@96.783,35.712 97.523,36.452 97.523,39.159 130.872,72.508 130.872,82.952 131.718,83.798 v2@131.718,83.854 ; v2@97.008,35.712 cw(c97.551,35.712) 97.167,36.096 ; v2@131.542,83.882 cw(c130.914,83.882) 131.358,83.438 cw(c131.802,82.994) v2@131.802,83.622
  other v2: 96.748,35.712
PB5: U2.2 U7.24 | length 134
  Top Layer w0.28: U2.2@29.499,53.34 v1@31.75,53.34 ; U2.2@30.412,53.227 cw(c30.685,52.954) 30.685,53.34 cw(c30.685,53.726) U2.2@30.412,53.453 ; v1@31.492,53.209 ccw(c31.176,52.893) 31.176,53.34 ccw(c31.176,53.787) v1@31.492,53.471 ; v1(124.431,83.827) 130.683,83.827 134.532,87.676 U7.24@135.817,87.676 ; v1@124.562,83.696 cw(c124.878,83.38) 124.878,83.827 cw(c124.878,84.274) v1@124.562,83.958
  MidLayer2 w0.28: v1(31.623,53.34) 38.481,53.34 42.445,49.376 101.319,49.376 124.431,72.488 v1(124.431,83.827) ; v1@31.754,53.209 cw(c32.07,52.893) 32.07,53.34 cw(c32.07,53.787) v1@31.754,53.471 ; v1@124.3,83.696 cw(c123.985,83.38) 124.431,83.38 cw(c124.878,83.38) v1@124.562,83.696
PB6: U1.3 U7.25 | length 136.4
  Top Layer w0.28: U1.3@29.499,44.018 v1(31.115,44.018) ; U1.3@30.412,43.905 cw(c30.685,43.632) 30.685,44.018 cw(c30.685,44.404) U1.3@30.412,44.131 ; v1@30.984,43.887 ccw(c30.668,43.572) 30.668,44.018 ccw(c30.668,44.465) v1@30.984,44.149 ; v1@125.176,84.539 v1@125.187,84.539 ; v1(125.187,84.493) 130.669,84.493 134.353,88.176 U7.25@135.817,88.176 ; v1@125.318,84.362 cw(c125.634,84.046) 125.634,84.493 cw(c125.634,84.939) v1@125.318,84.623
  MidLayer2 w0.28: v1@30.984,44.149 ccw(c30.668,44.465) 31.115,44.465 ccw(c31.562,44.465) v1@31.246,44.149 ; v1(31.115,44.018) 31.115,46.228 33.772,48.885 101.546,48.885 125.176,72.515 v1@125.176,84.539 ; v1@125.056,84.362 cw(c124.766,84.072) 125.176,84.072 ; 125.176,84.02 cw(c125.66,84.02) v1@125.318,84.362
PB7: U1.2 U7.26 | length 138
  Top Layer w0.28: U1.2@29.499,42.748 v1(31.115,42.748) ; U1.2@30.412,42.635 cw(c30.685,42.362) 30.685,42.748 cw(c30.685,43.134) U1.2@30.412,42.861 ; v1@30.984,42.617 ccw(c30.668,42.302) 30.668,42.748 ccw(c30.668,43.195) v1@30.984,42.879 ; v1(125.915,85.158) 130.648,85.158 134.267,88.776 U7.26@134.267,89.726 ; v1@126.046,85.027 cw(c126.362,84.711) 126.362,85.158 cw(c126.362,85.604) v1@126.046,85.288 ; 134.132,88.641 ccw(c133.807,88.966) U7.26@134.267,88.966
  MidLayer2 w0.28: v1(31.115,42.748) 31.623,42.748 31.877,43.002 31.877,46.323 33.959,48.405 101.745,48.405 125.921,72.581 v1@125.921,85.301 ; v1@31.246,42.617 cw(c31.562,42.302) 31.562,42.748 cw(c31.562,43.195) v1@31.246,42.879 ; v1@125.784,85.027 cw(c125.453,84.696) 125.921,84.696 ; 125.921,84.726 cw(c126.346,84.726) v1@126.046,85.027
PC0: D2.2 U7.53 | length 27.8
  Top Layer w0.28: v1@119.288,90.289 cw(c118.972,89.973) 119.419,89.973 cw(c119.866,89.973) v1@119.55,90.289 ; v1(119.419,90.42) 119.419,87.356 119.598,87.176 U7.53@120.717,87.176 ; v1(119.419,107.072) D2.2@121.211,107.072 ; v1@119.55,106.941 cw(c119.866,106.626) 119.866,107.072 cw(c119.866,107.519) v1@119.55,107.203 ; D2.2@120.852,106.713 ccw(c119.986,105.847) 119.986,107.072 ccw(c119.986,108.298) D2.2@120.852,107.431
  MidLayer2 w0.28: v1@119.288,90.551 ccw(c118.972,90.867) 119.419,90.867 ccw(c119.866,90.867) v1@119.55,90.551 ; v1@119.288,106.941 cw(c118.972,106.626) 119.419,106.626 cw(c119.866,106.626) v1@119.55,106.941 ; v1(119.419,90.42) v1@119.419,107.241
PD0: R38.2 U7.43 U14.16 | length 94.9
  Top Layer w0.28: R38.2@85.958,31.574 ccw(c86.025,32.699) 86.822,31.902 ; R38.2@86.204,31.284 86.822,31.902 ; R38.2@86.436,31.067 cw(c87.519,31.067) 86.753,31.833 ; U14.16@88.262,31.771 ccw(c87.947,31.456) 87.947,31.902 ccw(c87.947,32.349) U14.16@88.262,32.033 ; U14.16@88.893,31.902 86.822,31.902 ; U14.16@88.898,31.907 v2(90.488,31.907) ; U14.16@89.524,31.771 cw(c89.851,31.444) 89.851,31.907 ; U14.16@89.524,32.033 ccw(c89.828,32.337) 89.828,31.907 ; v2@90.304,31.723 ccw(c89.86,31.279) 89.86,31.907 ccw(c89.86,32.535) v2@90.304,32.091 ; U7.43@125.767,88.966 ccw(c126.374,88.966) 125.944,88.537 ; U7.43@125.767,89.726 125.767,88.715 126.26,88.222 130.578,88.222 131.137,87.663 v1(131.137,86.952) ; v1@131.006,87.082 ccw(c130.69,87.398) 131.137,87.398 ccw(c131.583,87.398) v1@131.268,87.082
  MidLayer2 w0.28: v2(90.488,31.907) 95.297,31.907 98.003,34.613 98.003,38.764 131.352,72.113 131.352,82.382 132.628,83.658 132.628,85.534 131.21,86.952 v1(131.137,86.952) ; v2@90.672,31.723 cw(c91.116,31.279) 91.116,31.907 cw(c91.116,32.535) v2@90.672,32.091 ; v1@131.137,86.767 cw(c131.137,86.142) 131.578,86.584
PD1: R50.2 U7.44 U19.14 | length 64.8
  Top Layer w0.28: U19.14@95.393,49.626 96.599,49.626 97.054,50.081 97.054,51.388 97.41,51.744 R50.2@99.306,51.744 ; U19.14@96.024,49.495 cw(c96.34,49.18) 96.34,49.626 cw(c96.34,50.073) U19.14@96.024,49.757 ; v2@97.983,51.56 ccw(c97.539,51.116) 97.539,51.744 ccw(c97.539,52.371) v2@97.983,51.928 ; v2@98.351,51.56 cw(c98.795,51.116) 98.795,51.744 cw(c98.795,52.371) v2@98.351,51.928 ; R50.2@98.947,51.385 ccw(c98.081,50.518) 98.081,51.744 ccw(c98.081,52.969) R50.2@98.947,52.103 ; R50.2@99.286,51.744 R50.2@99.364,51.822 ; U7.44@125.267,89.726 125.267,88.508 125.866,87.908 v1(125.866,87.209) ; v1@125.735,87.339 ccw(c125.419,87.655) 125.866,87.655 ccw(c126.313,87.655) v1@125.997,87.339
  MidLayer2 w0.28: v2(98.167,51.744) 102.29,51.744 122.941,72.395 122.941,84.284 v1(125.866,87.209) ; v2@98.351,51.56 cw(c98.795,51.116) 98.795,51.744 cw(c98.795,52.371) v2@98.351,51.928 ; v1@125.681,87.209 cw(c125.234,87.209) 125.55,86.893 cw(c125.866,86.577) v1@125.866,87.024
PD2: R49.2 U7.45 U19.16 | length 62.8
  Top Layer w0.28: U19.16@95.262,52.297 ccw(c94.947,52.613) 95.393,52.613 ccw(c95.84,52.613) U19.16@95.524,52.297 ; U19.16@95.393,52.166 95.393,53.178 96.012,53.797 R49.2@99.306,53.797 ; v2@97.997,53.613 ccw(c97.553,53.169) 97.553,53.797 ccw(c97.553,54.425) v2@97.997,53.981 ; v2@98.365,53.613 cw(c98.809,53.169) 98.809,53.797 cw(c98.809,54.425) v2@98.365,53.981 ; R49.2@98.947,53.438 ccw(c98.081,52.571) 98.081,53.797 ccw(c98.081,55.023) R49.2@98.947,54.156 ; U7.45@124.767,89.726 124.767,88.329 125.033,88.063 ; v1@124.917,87.822 ccw(c124.725,88.063) 125.033,88.063 ; 124.973,88.123 cw(c124.589,87.738) v1@125.127,87.665 ; v1(125.033,87.678) 125.033,88.063 ; v1@125.149,87.822 cw(c125.341,88.063) 125.033,88.063
  MidLayer2 w0.28: v2(98.181,53.797) 103.581,53.797 122.196,72.412 122.196,84.841 v1(125.033,87.678) ; v2@98.365,53.613 cw(c98.809,53.169) 98.809,53.797 cw(c98.809,54.425) v2@98.365,53.981 ; v1@124.848,87.678 cw(c124.401,87.678) 124.717,87.362 cw(c125.033,87.046) v1@125.033,87.493
PD3: R53.2 U7.46 U19.10 | length 74
  Top Layer w0.28: U19.10@95.393,44.546 96.501,44.546 97.46,45.505 97.46,46.908 98.189,47.637 ; U19.10@96.024,44.415 cw(c96.34,44.1) 96.34,44.546 cw(c96.34,44.993) U19.10@96.024,44.677 ; v2@97.241,46.395 cw(c96.713,45.867) 97.46,45.867 ; v2@97.405,46.579 cw(c98.066,46.579) 97.599,47.047 ; 97.46,46.036 cw(c97.968,46.036) v2@97.609,46.395 ; v2@97.685,46.579 cw(c99.022,46.579) 98.077,47.525 ; R53.2@98.924,47.303 ccw(c98.189,46.662) 98.189,47.637 ; R53.2@98.924,47.971 cw(c98.189,48.612) 98.189,47.637 ; R53.2@99.306,47.637 98.189,47.637 ; U7.46@124.267,89.726 124.267,86.974 124.732,86.509 v1(127.406,86.509) ; v1@127.275,86.378 ccw(c126.959,86.062) 126.959,86.509 ccw(c126.959,86.955) v1@127.275,86.639
  MidLayer2 w0.28: v2(97.425,46.579) 101.316,46.579 127.411,72.674 v1@127.411,86.509 ; v2@97.609,46.395 cw(c98.053,45.951) 98.053,46.579 cw(c98.053,47.207) v2@97.609,46.763 ; v1@127.275,86.378 cw(c126.946,86.049) 127.411,86.049 ; 127.411,86.075 cw(c127.839,86.075) v1@127.537,86.378
PD7: U7.50 U14.6 | length 77.4
  Top Layer w0.28: U14.6@95.393,38.252 v2@96.783,38.252 ; U14.6@96.024,38.121 cw(c96.34,37.806) 96.34,38.252 cw(c96.34,38.699) U14.6@96.024,38.383 ; v2@96.564,38.068 ccw(c96.121,37.625) 96.121,38.252 ccw(c96.121,38.88) v2@96.564,38.436 ; U7.50@122.267,89.726 122.267,87.77 124.207,85.83 v1(129.604,85.83) ; v1@129.473,85.699 ccw(c129.157,85.383) 129.157,85.83 ccw(c129.157,86.276) v1@129.473,85.96
  MidLayer2 w0.28: v2@96.564,38.436 ccw(c96.036,38.964) 96.783,38.964 ; v2@96.783,38.252 96.783,39.169 130.392,72.778 130.392,84.972 v1@129.534,85.83 ; 96.783,38.795 ccw(c97.291,38.795) v2@96.932,38.436 ; v1@129.604,85.645 cw(c129.604,85.367) 129.8,85.563 ; v1@129.789,85.83 ccw(c130.405,85.83) 129.969,85.394
  other v2: 96.748,38.252
PE0_RX0: P11.3 U7.2 | length 15.5
  Top Layer w0.28: U7.2@135.817,76.676 137.433,76.676 v2(137.829,76.28)
  MidLayer2 w0.28: v2(137.829,76.28) 138.795,76.28 141.095,78.58 P11.3@145.631,78.58 ; v2@138.013,76.096 cw(c138.457,75.652) 138.457,76.28 cw(c138.457,76.908) v2@138.013,76.464 ; P11.3@145.2,78.148 ccw(c144.158,77.107) 144.158,78.58 ccw(c144.158,80.052) P11.3@145.2,79.011 ; P11.3@145.398,78.346 ccw(c144.834,77.783) 144.834,78.58 ccw(c144.834,79.376) P11.3@145.398,78.813
PE1_TX0: P11.2 U7.3 | length 17
  Top Layer w0.28: U7.3@135.817,77.176 137.43,77.176 v2(137.913,77.659) ; v2@137.653,77.659 cw(c137.025,77.659) 137.469,77.215 cw(c137.913,76.771) v2@137.913,77.399
  MidLayer2 w0.28: v2(137.913,77.659) 139.25,77.659 142.711,81.12 P11.2@145.631,81.12 ; v2@138.097,77.475 cw(c138.541,77.031) 138.541,77.659 cw(c138.541,78.287) v2@138.097,77.843 ; P11.2@145.2,80.688 ccw(c144.158,79.647) 144.158,81.12 ccw(c144.158,82.592) P11.2@145.2,81.551 ; P11.2@145.398,80.886 ccw(c144.834,80.323) 144.834,81.12 ccw(c144.834,81.916) P11.2@145.398,81.353
PE3: U5.3 U7.5 | length 116.6
  Top Layer w0.28: U5.3@40.04,44.018 v1(42.545,44.018) ; U5.3@41.727,43.905 cw(c42,43.632) 42,44.018 cw(c42,44.404) U5.3@41.727,44.131 ; v1@42.414,43.887 ccw(c42.098,43.572) 42.098,44.018 ccw(c42.098,44.465) v1@42.414,44.149 ; v1@128.177,78.176 U7.5@135.817,78.176 ; v1@128.287,78.046 cw(c128.603,77.73) 128.603,78.176 cw(c128.603,78.623) v1@128.287,78.307
  MidLayer2 w0.28: v1@42.545,44.069 v1(42.545,44.018) 44.217,45.69 101.141,45.69 128.157,72.705 v1(128.157,78.176) ; v1@42.545,44.203 ccw(c42.545,44.65) 42.861,44.334 ccw(c43.177,44.018) v1@42.73,44.018 ; v1@128.026,78.046 cw(c127.71,77.73) 128.157,77.73 cw(c128.603,77.73) v1@128.287,78.046